# Altium PCB power_suply.PcbDoc
Units mil, origin at the board's own origin, x right, y up, seen from the top; angles counter-clockwise.
Board outline 6300 x 4800 mil, 2 copper layers (Top Layer, Top, Bottom Layer, Bottom); 13 components, 9 nets, 40 pads, 1 vias.
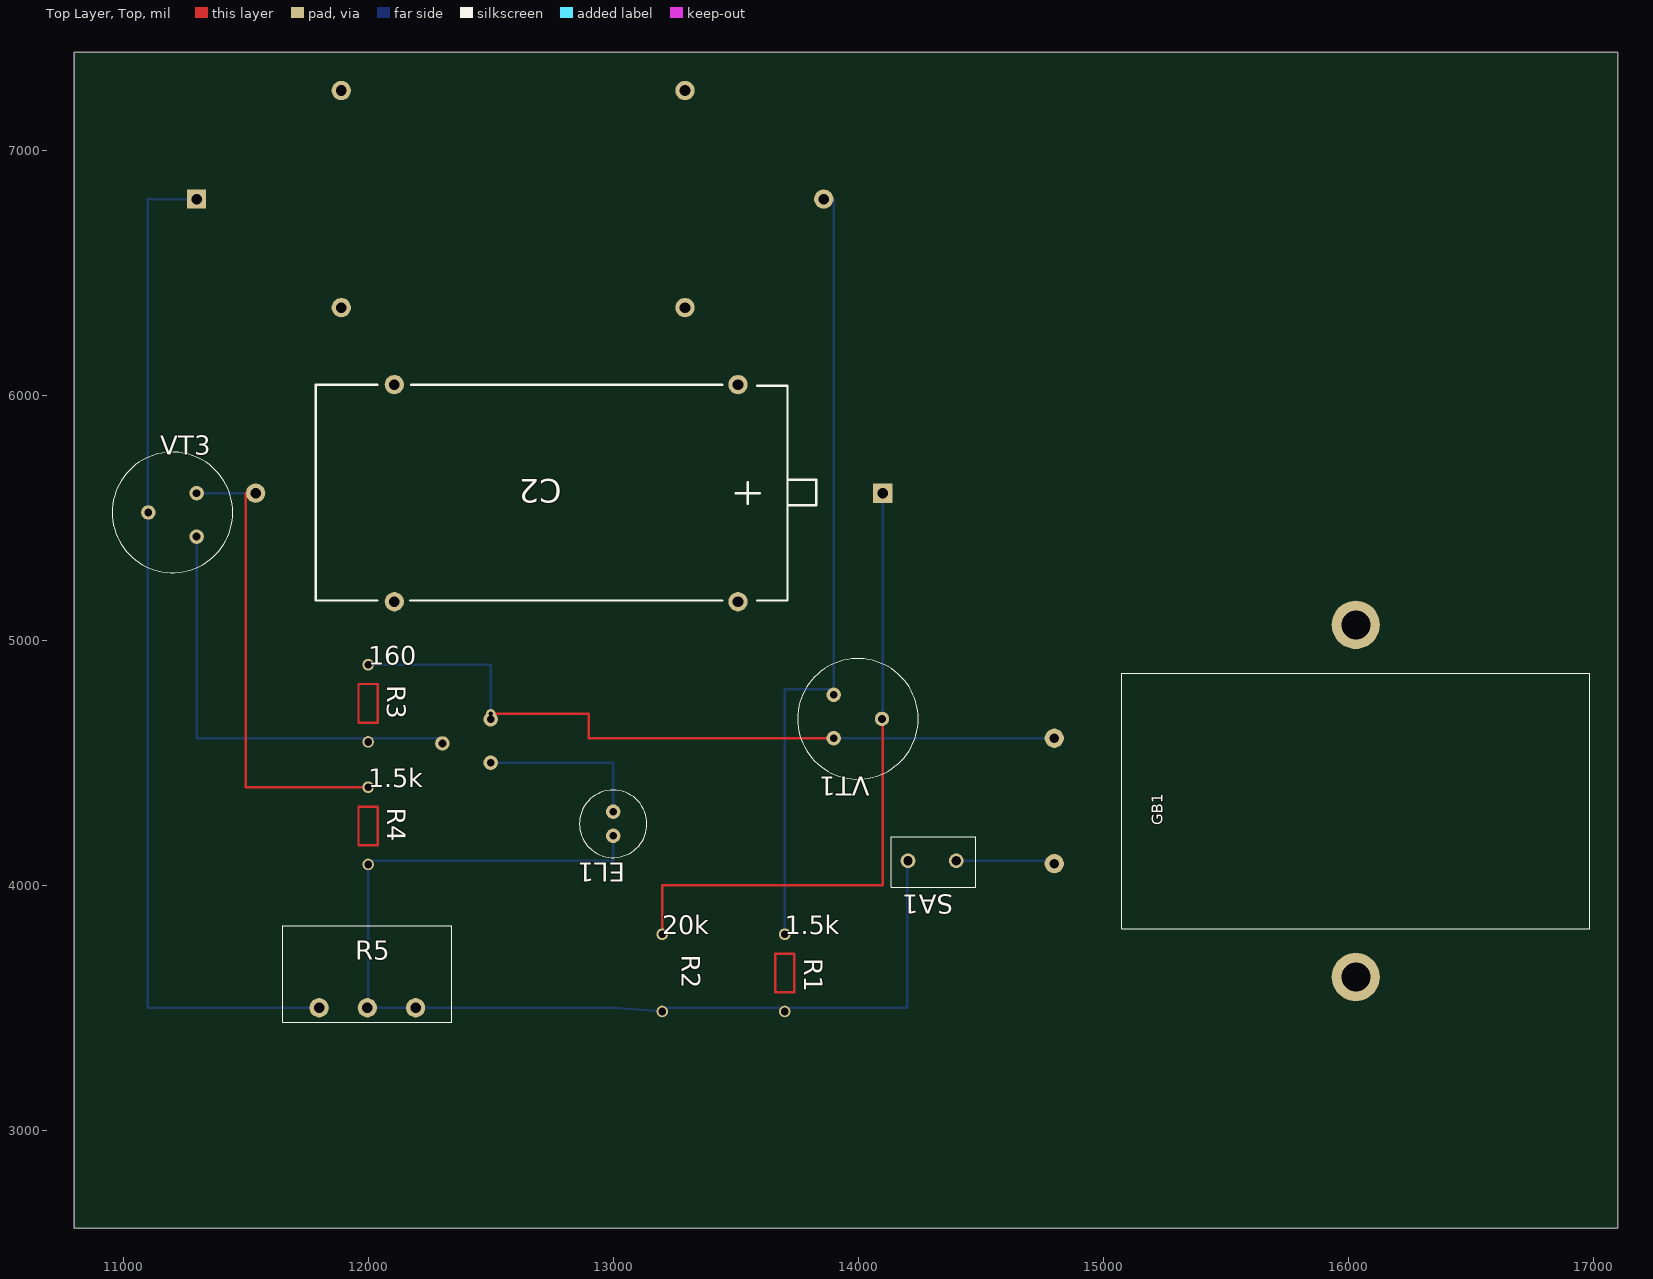
[diagram p0: Top Layer, Top view]
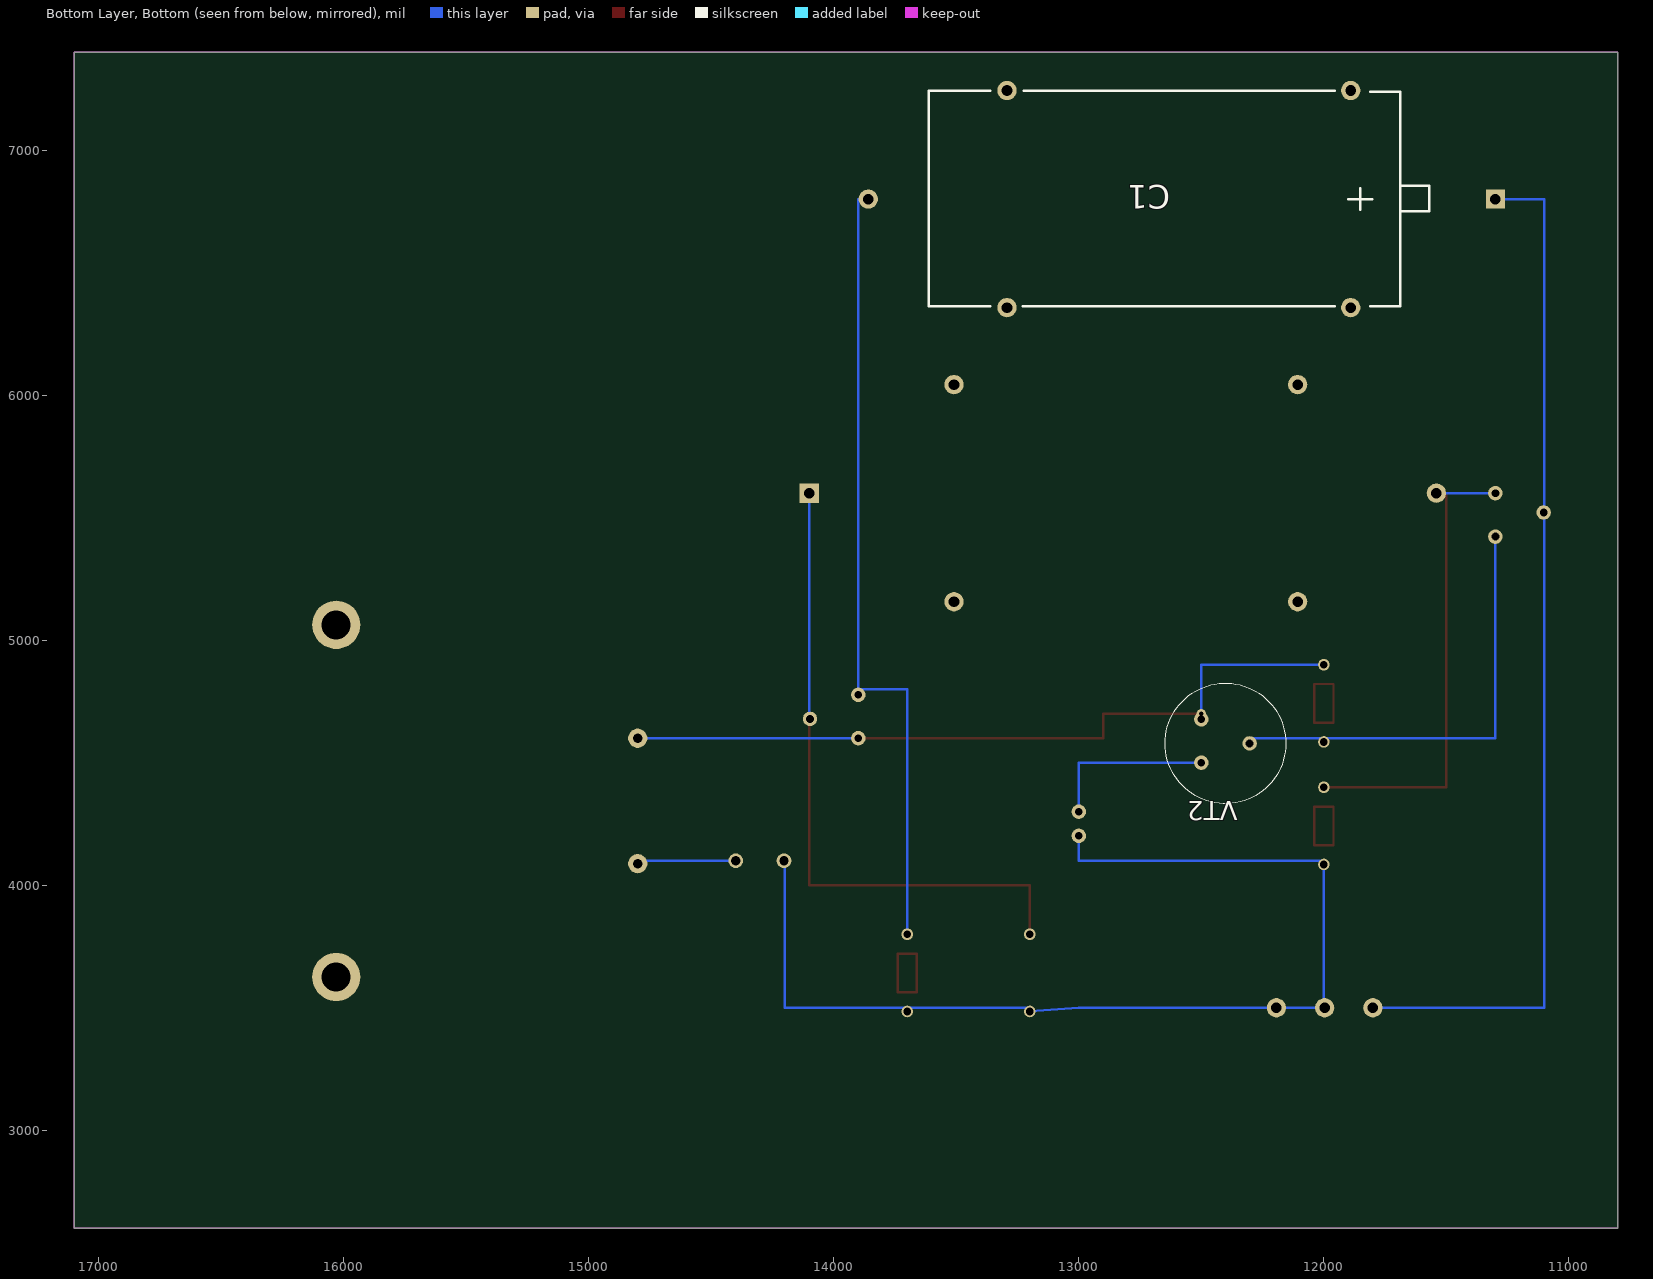
[diagram p1: Bottom Layer, Bottom view, seen from below]

## Layer stack, top to bottom
Top Solder, Top Mask: solder mask 0.4, Solder Resist, Dk 3.5
Top Layer, Top: signal copper 1.4
Dielectric 1: dielectric 12.6, FR-4, Dk 4.8
Bottom Layer, Bottom: signal copper 1.4
Bottom Solder, Bot Mask: solder mask 0.4, Solder Resist, Dk 3.5

## Board outline
10800,7400 10800,2600 17100,2600 17100,7400

## Design rules (kind name [scope] priority, off if disabled: settings)
Clearance [All] p1: gap=10 ignorepadtopadclearanceinfootprint=FALSE except(0: Arc-Hole Track-Hole SMDPad-Hole THPad-Hole Via-Hole Fill-Hole Poly-Hole Region-Hole Text-Hole; 12: Arc-Arc Arc-Track Arc-THPad Arc-Via Track-Track Track-THPad Track-Via THPad-THPad THPad-Via Via-Via)
PlaneClearance [All] p1: clearance=10
PolygonConnect [All] p1: connectstyle=Relief reliefconductorwidth=10 reliefentries=4 polygonreliefangle="90 Angle" airgapwidth=10
RoutingVias [All] p1: holewidth=28 width=50 viastyle="Through Hole" minholewidth=28 minwidth=50 maxholewidth=28 maxwidth=50
SolderMaskExpansion [All] p1: expansion=4 istentingtop=FALSE
Width [All] p1: maxlimit=10 minlimit=10 preferedwidth=10
29 further rules are at their usual default settings.

## Components (designator, comment, footprint, x,y, rotation, side; value= is the part's Value field where it differs from the comment)
C1 "50mk x 6B" K5024-6 11300,6800 r0 bottom
C2 "10mk x 6B" K5024-6 14100,5600 r180 top
EL1 "2,5B" HL_MINI 13000,4300 r180 top
GB1 "4.5B" KRONA_KRONA(Primary) 14800,4600 r90 top
R1 "1.5k" R100#1 13700,3800 r270 top
R2 "20k" R100#2 13200,3800 r270 top
R3 "160" R100#1 12000,4900 r270 top
R4 "1.5k" R100#1 12000,4400 r270 top
R5 "150k" 16K1 11800,3500 r0 top
SA1 "" 8AS9M2RE 14400,4100 r180 top
VT1 "" П27_МП41А(Primary) 13900,4600 r180 top
VT2 "" П27_МП41А(Primary) 12500,4500 r0 bottom
VT3 "" П27_МП41А(Primary) 11300,5600 r0 top

## Footprints (in the part's own frame and the unit in brackets; to place one, negate y for a bottom-side part, rotate by r counter-clockwise, add the part's x,y. Pads: shape width x height; smd on the part's side, far side on the other; paste and mask are expansions set on the pad)
8AS9M2RE [mil]
  round 60 hole 38: 1(0,0) 2(196.85,0)
  silkscreen extent -79,-98 266,108
16K1 [mm]
  round 2 hole 1.1: 1(0,0) 2(10,0) 3(5,0)
  silkscreen extent -3.75,-1.5 13.75,8.5
HL_MINI [mm]
  round 1.5 hole 0.8: 1(0,0) 2(0,2.5)
  silkscreen extent -3.5,-2.25 3.5,4.75
K5024-6 [mm]
  rect 2x2 hole 1.1: 1(0,0)
  round 2 hole 1.1: 2(65,0) 3(15,11.25) 4(15,-11.25) 5(50.625,11.25) 6(50.625,-11.25)
  silkscreen extent 6.88,-11.25 58.75,11.12
KRONA_KRONA(Primary) [mm]
  round 5 hole 3: 1(11.75,-31.25) 2(-24.75,-31.25)
  round 2 hole 1: minus(-13,0) plus(0,0)
  silkscreen extent -19.75,-55.5 6.75,-7
R100#1 [mm]
  round 1.2 hole 0.8: 1(0,0) 2(8,0)
  Top Layer, Top lines w0.254: 6,-1 2,-1 2,1 6,1 6,-1
R100#2 [mm]
  round 1.2 hole 0.8: 1(0,0) 2(8,0)
П27_МП41А(Primary) [mm]
  round 1.5 hole 0.8: B(-5,-2) E(0,0) K(0,-4.5)
  silkscreen extent -8.75,-8.25 3.75,4.25

## Via types
v1: diameter 40, hole 18, Top Layer, Top to Bottom Layer, Bottom, 1 vias

## Nets (pads, with @x,y where several pads share a name; then routed paths per layer and width w, separated by ;. In a path a pad name is that pad's centre, name@x,y a point inside that pad or via, vN(x,y) a via of type N, cw(c..) or ccw(c..) an arc to the next point about the centre after c; other vN are vias at no path point)
NET00000: R3.2 VT2.B VT3.K | length 1859.3
  Bottom Layer, Bottom w10: VT3.K 11300,4600 R3.2@12000,4600 ; R3.2 R3.2@12000,4600 ; VT2.B 12300,4600 R3.2@12000,4600
NET00001: C1.2 R1.1 VT1.K | length 3263.8
  Bottom Layer, Bottom w10: R1.1 13700,4800 VT1.K@13900,4800 ; C1.2 13900,6800 VT1.K@13900,4800 ; VT1.K VT1.K@13900,4800
NET00003: C2.1 R2.1 VT1.B | length 2743
  Top Layer, Top w10: R2.1 13200,4000 14100,4000 14100,4700 VT1.B
  Bottom Layer, Bottom w10: VT1.B 14100,4700 C2.1
NET00004: C1.1 R5.1 VT3.B | length 4221.5
  Bottom Layer, Bottom w10: VT3.B VT3.B@11100,5500 ; C1.1 11100,6800 VT3.B@11100,5500 ; R5.1 11100,3500 VT3.B@11100,5500
NET00005: C2.2 R4.1 VT3.E | length 1981.9
  Top Layer, Top w10: C2.2 11500,5600 11500,4400 R4.1
  Bottom Layer, Bottom w10: VT3.E C2.2
NET00006: EL1.2 R1.2 R2.2 R4.2 R5.2 R5.3 SA1.2 | length 4538.4
  Bottom Layer, Bottom w10: R5.3 R5.3@12000,3500 ; EL1.2 13000,4100 12000,4100 R4.2 R5.3@12000,3500 ; R1.2 R1.2@13700,3500 ; SA1.2 14200,4100 14200,3500 R1.2@13700,3500 ; R5.3@12000,3500 R5.2 13000,3500 R2.2 13200,3500 R1.2@13700,3500
NET00007: GB1.minus SA1.1 | length 411.8
  Bottom Layer, Bottom w10: SA1.1 14800,4100 GB1.minus
NET00008: GB1.plus R3.1 VT1.E VT2.K | length 3122.8
  Top Layer, Top w10: v1(12500,4700) 12900,4700 12900,4600 VT1.E
  Bottom Layer, Bottom w10: R3.1 12500,4900 v1(12500,4700) VT2.K ; VT1.E GB1.plus
NET00009: EL1.1 VT2.E | length 700
  Bottom Layer, Bottom w10: VT2.E 13000,4500 EL1.1
pads on no net: C1.3 C1.4 C1.5 C1.6 C2.3 C2.4 C2.5 C2.6 GB1.1 GB1.2

## Keep-outs
Keep-Out Layer, Board:
  the board outline again, w5

## Text inside footprints (layer, text, board x,y; h text height)
VT1: Mechanical 1, Top Assy "Э" at 13988.58,4629.53 h59.06 r180; Mechanical 1, Top Assy "K" at 13978.74,4806.69 h59.06 r180; Mechanical 1, Top Assy "Б" at 14057.48,4708.27 h59.06 r180
VT2: Mechanical 2, Bot Assy "Э" at 12411.42,4529.53 h59.06 r180; Mechanical 2, Bot Assy "K" at 12421.26,4706.69 h59.06 r180; Mechanical 2, Bot Assy "Б" at 12342.52,4608.27 h59.06 r180
VT3: Mechanical 1, Top Assy "Э" at 11211.42,5570.47 h59.06; Mechanical 1, Top Assy "K" at 11221.26,5393.31 h59.06; Mechanical 1, Top Assy "Б" at 11142.52,5491.73 h59.06